# EAGLE board keycopy (EAGLE 6.3)
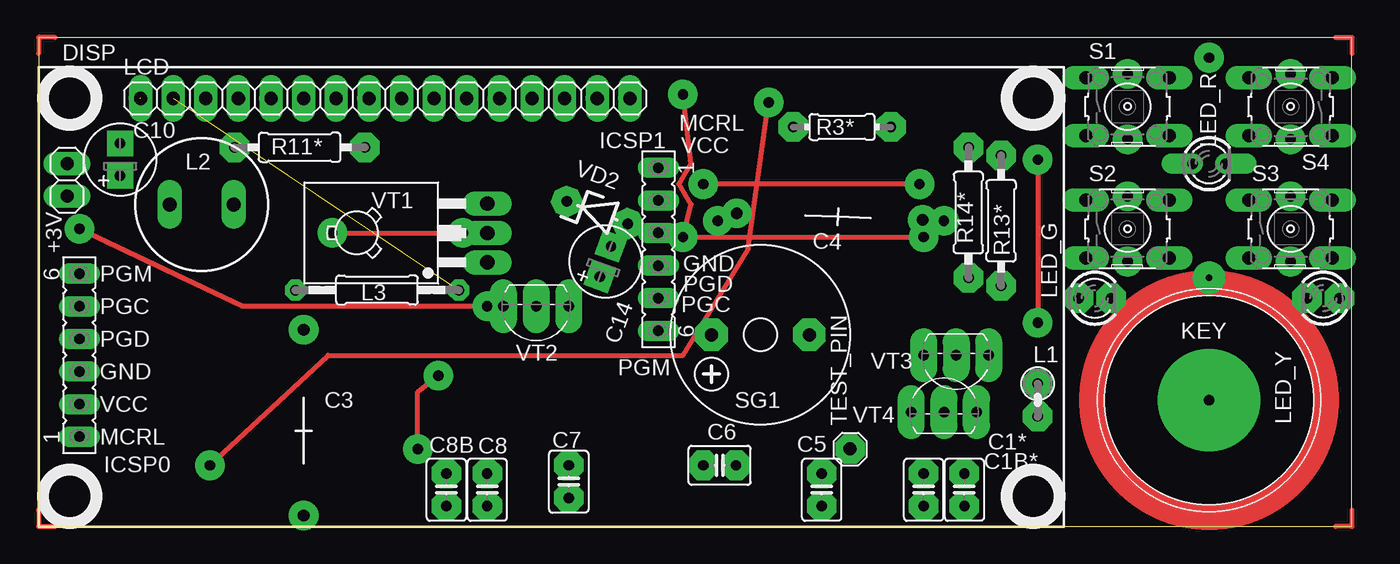
[diagram p0: board, top side]
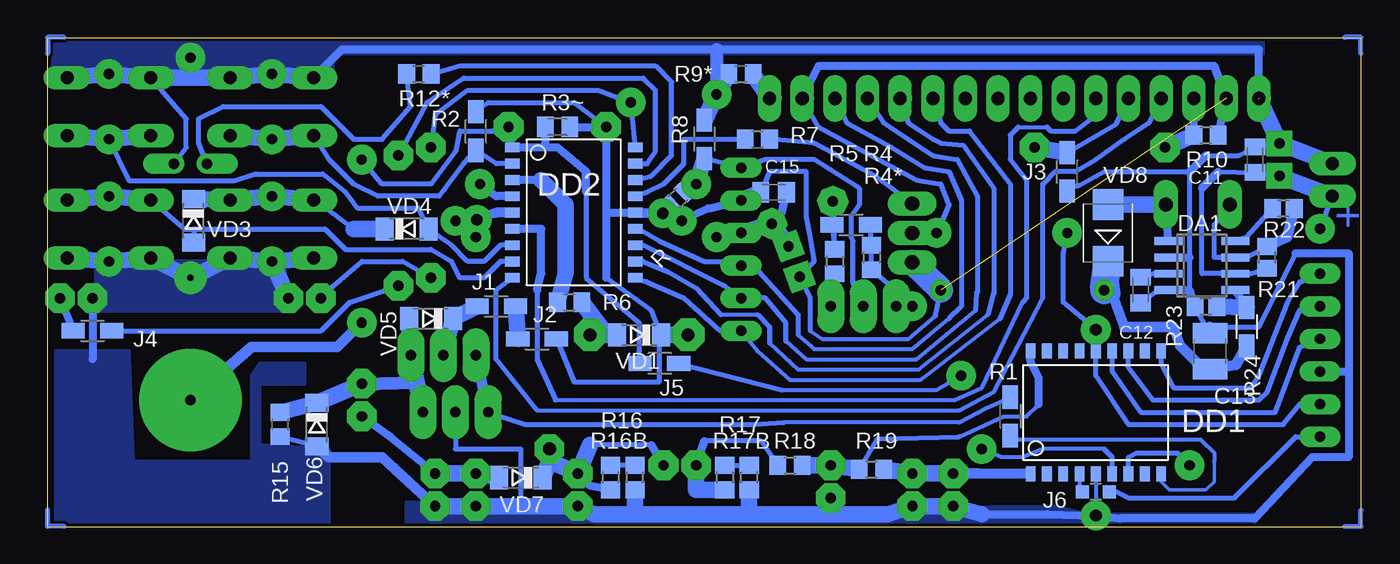
[diagram p1: board, bottom side, seen from below]

Size 102.21 x 38.1 mm. Coordinates in mm from the lower left corner, seen from the top.
Outline: 102.21,0 102.21,38.1 0,38.1 0,0 102.21,0
Copper layers (1*16): Top 0.035mm / dielectric 1.5mm / Bottom 0.035mm
Design rules "DesignRules": minimum track width 8mil, minimum drill 24mil, track to track 0.2mm, track to pad 0.2mm, pad to pad 8mil, via to via 8mil, smd to smd 8mil, copper to edge 10mil, drill to drill 8mil, minimum pad ring 0.4mm, minimum via ring 8mil, stop-mask expansion 4mil, vias tented up to drill 0mil, thermal gap 10mil

## Footprints (pad centres in the part's own frame; a part is rotated, then mirrored left to right if it is on the bottom)
1X02 = drill 1.016 long: 1 -1.27,0; 2 1.27,0
C025-030X050 = drill 0.8 pad 2.3 octagon: 1 -1.27,0; 2 1.27,0
CAP-PTH-LARGE = drill 0.9 pad 2.3: 1 -7.866,0; 2 6.612,0
E2,5-6 = drill 0.813 pad 2 square: + -1.27,0; - 1.27,0
C0805K = smd 1.3 x 1.6: 1 -1,0; 2 1,0
C1210 = smd 1.6 x 2.7: 1 -1.4,0; 2 1.4,0
SOIC8 = smd 0.6 x 2.2: 1 -1.905,-2.6; 2 -0.635,-2.6; 3 0.635,-2.6; 4 1.905,-2.6; 5 1.905,2.6; 6 0.635,2.6; 7 -0.635,2.6; 8 -1.905,2.6
SO-18W = smd 0.762 x 1.143: 1 -5.08,-4.788; 2 -3.81,-4.788; 3 -2.54,-4.788; 4 -1.27,-4.788; 5 0,-4.788; 6 1.27,-4.788; 7 2.54,-4.788; 8 3.81,-4.788; 9 5.08,-4.788; 10 5.08,4.788; 11 3.81,4.788; 12 2.54,4.788; 13 1.27,4.788; 14 0,4.788; 15 -1.27,4.788; 16 -2.54,4.788; 17 -3.81,4.788; 18 -5.08,4.788
TUXGR_16X2_1 = drill 1 pad 1.676: 1 -32,15.5; 2 -29.46,15.5; 3 -26.92,15.5; 4 -24.38,15.5; 5 -21.84,15.5; 6 -19.3,15.5; 7 -16.76,15.5; 8 -14.22,15.5; 9 -11.68,15.5; 10 -9.14,15.5; 11 -6.6,15.5; 12 -4.06,15.5; 13 -1.52,15.5; 14 1.02,15.5; 15 3.56,15.5; 16 6.1,15.5
FE06 = drill 0.813 long: 1 -6.35,0; 2 -3.81,0; 3 -1.27,0; 4 1.27,0; 5 3.81,0; 6 6.35,0
R1206W = smd 1.8 x 1.2: 1 -1.499,0; 2 1.499,0
R0805W = smd 1 x 1: 1 -1.052,0; 2 1.052,0
DS1990 = drill 0.8 pad 8: P$1 0,0 | drill 0.5 pad 2.54: P$2 0,9.525
0207/2V = drill 0.813 pad 2.3 octagon: 1 -1.27,0; 2 1.27,0
SD12K100 = drill 1.1 long: 1 -2.5,0; 2 2.5,0
0207/12 = drill 0.813 octagon: 1 -6.35,0; 2 6.35,0
1X16 = drill 1.016 long: 1 -19.05,0; 2 -16.51,0; 3 -13.97,0; 4 -11.43,0; 5 -8.89,0; 6 -6.35,0; 7 -3.81,0; 8 -1.27,0; 9 1.27,0; 10 3.81,0; 11 6.35,0; 12 8.89,0; 13 11.43,0; 14 13.97,0; 15 16.51,0; 16 19.05,0
LED3MM = drill 0.813 pad 2.3 octagon: A -1.27,0; K 1.27,0
LED3MM' = drill 0.813 offset: A -1.27,0; K 1.27,0
R0805 = smd 1.3 x 1.5: 1 -0.95,0; 2 0.95,0
0204/7 = drill 0.813 pad 2.3 octagon: 1 -3.81,0; 2 3.81,0
M0805 = smd 1.3 x 1.6: 1 -0.95,0; 2 0.95,0
0207/10 = drill 0.813 pad 2.3 octagon: 1 -5.08,0; 2 5.08,0
R0805' = smd 1.3 x 1.5: 1 -0.85,0; 2 0.85,0
B3F-10XX = drill 1.016 long: 1 -3.251,2.261; 2 3.251,2.261; 3 -3.251,-2.261; 4 3.251,-2.261
F/CM12P = drill 1.016 pad 2.54 octagon: + 3.81,0; - -3.81,0
1X01 = drill 1.016 pad 2.3 octagon: 1 0,0
PROGRAMMER_KEY = drill 0.8 pad 2.3: P$1 -2.54,0.635; P$2 2.54,0.635
SOD80C = smd 1.4 x 1.8: A 1.7,0; C -1.7,0
ZDIO-5 = drill 0.813 pad 2.3 octagon: A 2.54,0; C -2.54,0
SMB = smd 2.4 x 2.4: A 2.2,0; C -2.2,0
TO126 = drill 1.118 long: 1 -2.286,-5.08; 2 0,-5.08; 3 2.286,-5.08
TO92-BCE = drill 0.813 pad 2.1 long: B -2.54,0; C 0,0; E 2.54,0
TO92-ECB = drill 0.813 pad 2.1 long: B 2.54,0; C 0,0; E -2.54,0

## Placement (x,y rotation side)
+3V  [1X02]  2.22,27 90 top
C1*  2n2  [C025-030X050]  72.07,2.87 270 top
C1B*  [C025-030X050]  68.9,2.87 270 top
C3  3n3  [CAP-PTH-LARGE]  20.64,7.47 270 top
C4  3n3  [CAP-PTH-LARGE]  62.23,24.14 358 top
C5  1n  [C025-030X050]  60.96,2.87 270 top
C6  1n  [C025-030X050]  53.02,4.78 180 top
C7  3n3  [C025-030X050]  41.27,3.51 270 top
C8  100n  [C025-030X050]  34.93,2.87 270 top
C8B  47n  [C025-030X050]  31.75,2.87 270 top
C10  47n  [E2,5-6]  6.35,28.59 90 top
C11  100n  [C0805K]  8.26,28.59 90 bottom
C12  1n  [C0805K]  17.14,18.43 270 bottom
C13  22m  [C1210]  11.75,13.66 90 bottom
C14  47m  [E2,5-6]  44.13,20.65 70 top
C15  100n  [C0805K]  45.72,26.05 0 bottom
DA1  MC34063AD  [SOIC8]  12.38,20.33 270 bottom
DD1  PIC16F648A  [SO-18W]  20.64,8.9 0 bottom
DD2  PIC16F648A  [SO-18W]  61.28,24.46 270 bottom
DISP  QC1602A V2.0  [TUXGR_16X2_1]  39.93,17.87 0 top
ICSP0  [FE06]  3.17,13.35 90 top
ICSP1  [FE06]  48.26,21.6 270 top
J1  [R1206W]  67.31,17.16 0 bottom
J2  [R1206W]  64.13,14.62 0 bottom
J3  [R1206W]  22.86,27.64 90 bottom
J4  [R1206W]  98.74,15.25 0 bottom
J5  [R1206W]  54.61,12.71 180 bottom
J6  [R0805W]  20.64,2.71 180 bottom
KEY  DS1990  [DS1990]  91.12,9.85 0 top
L1  777uH  [0207/2V]  77.79,9.85 270 top
L2  100uH  [SD12K100]  12.7,25.1 0 top
L3  100uH  [0207/12]  26.35,18.43 0 top
LCD  [1X16]  26.99,33.35 0 top
LED_G  WR  [LED3MM]  82.23,17.79 0 top
LED_R  ON  [LED3MM']  91.12,28.27 0 top
LED_Y  RD  [LED3MM]  100.01,17.79 180 top
R  10k  [R0805]  53.18,25.57 225 bottom
R1  1k  [R1206W]  27.3,8.58 270 bottom
R2  10k  [R1206W]  68.9,30.81 90 bottom
R3*  1k2  [0204/7]  62.55,31.13 180 top
R3~  SMD  [M0805]  62.55,31.13 0 bottom
R4  1k  [R1206W]  39.69,23.51 0 bottom
R4*  20  [R0805]  38.1,20.97 270 bottom
R5  10k  [R0805]  40.96,20.65 270 bottom
R6  150  [R0805]  61.59,17.48 0 bottom
R7  1k  [R0805]  46.99,30.18 0 bottom
R8  10k  [R1206W]  51.12,30.18 270 bottom
R9*  510  [R0805]  48.26,35.25 0 bottom
R10  1k  [R0805]  12.06,30.49 0 bottom
R11*  270  [0207/10]  20.32,29.54 180 top
R12*  1k  [R0805]  73.34,35.25 0 bottom
R13*  1k1  [0207/10]  74.93,23.83 90 top
R14*  750  [0207/10]  72.39,24.46 90 top
R15  1k  [R0805]  84.14,7.95 90 bottom
R16  910k  [R0805]  58.42,3.82 270 bottom
R16B  91k  [R0805]  56.52,3.82 90 bottom
R17  910k  [R0805]  49.53,3.82 270 bottom
R17B  91k  [R0805]  47.62,3.82 90 bottom
R18  22k  [R0805]  44.45,4.78 0 bottom
R19  47k  [R0805]  38.1,4.46 0 bottom
R21  0.5R  [R0805']  7.3,20.97 90 bottom
R22  150  [R0805']  6.03,24.78 180 bottom
R23  1k  [R0805']  12.06,17.16 0 bottom
R24  3k  [R1206W]  8.89,15.57 270 bottom
S1  Enter  [B3F-10XX]  84.77,32.71 0 top
S2  Menu  [B3F-10XX]  84.77,23.19 0 top
S3  Dn  [B3F-10XX]  97.47,23.19 0 top
S4  Up  [B3F-10XX]  97.47,32.71 180 top
SG1  F/CM12P  [F/CM12P]  56.2,14.93 180 top
TEST_PIN  +30V  [1X01]  63.18,6.04 90 top
U$1  PROGRAMMER_5.08  [PROGRAMMER_KEY]  85.41,32.71 90 top
U$6  PROGRAMMER_5.08  [PROGRAMMER_KEY]  96.84,32.71 270 top
U$7  PROGRAMMER_5.08  [PROGRAMMER_KEY]  98.11,23.19 90 top
U$8  PROGRAMMER_5.08  [PROGRAMMER_KEY]  85.41,23.19 90 top
VD1  5v6  [SOD80C]  56.2,14.93 180 bottom
VD2  1v5*  [ZDIO-5]  43.5,24.46 340 top
VD3  LL4148  [SOD80C]  90.88,23.83 270 bottom
VD4  LL4148  [SOD80C]  74.3,23.19 0 bottom
VD5  LL4148  [SOD80C]  72.39,16.21 180 bottom
VD6  LL4148  [SOD80C]  81.28,7.95 270 bottom
VD7  LL4848  [SOD80C]  65.41,3.82 180 bottom
VD8  SS14  [SMB]  19.68,22.87 90 bottom
VT1  КТ816  [TO126]  29.84,22.87 90 top
VT2  КТ361Б  [TO92-BCE]  38.73,17.16 180 top
VT3  КТ315  [TO92-ECB]  71.44,13.35 180 top
VT4  КТ361  [TO92-BCE]  70.48,8.9 0 top

## Library data of the parts
+3V C1* C1B* C3-C8 C8B C10 C14 DISP J1-J6 L1 R1 R3* R3~ R7 R9* R11* R13* R14* TEST_PIN VD2 VT1-VT4 = keycopy
C11 C12 C15 R21-R24 = resistor
C13 L3 R R2 R4 R4* R5 R6 R8 R10 R12* R15 R16 R16B R17 R17B R18 R19 = rcl
DA1 = mc34063
DD1 DD2 = microchip; MF: MICROCHIP; MPN: PIC16F628-20I/SO; OC_FARNELL: 9760415; OC_NEWARK: 23C4986
ICSP0 ICSP1 = con-lsta; OC_FARNELL: unknown; OC_NEWARK: unknown
KEY = keysens
L2 = inductor-neosid; OC_FARNELL: unknown; OC_NEWARK: unknown
LCD = pinhead
LED_G LED_Y = keycopy2
LED_R = keycopy3
S1-S4 = switch-omron; MPN: B3F-1000; OC_FARNELL: 176432; OC_NEWARK: 36M3542
SG1 = buzzer; OC_FARNELL: unknown; OC_NEWARK: unknown
U$1 U$6-U$8 = HWProgUSB
VD1 VD3-VD8 = diode

## Nets
1W: DD2.1 J5.2 KEY.P$1 R3*.1 R3~.1
A0: DD2.17 R13*.2
A1: DD1.7 DD2.18 R14*.2
A4: DD2.3 R6.1
A5: DD2.4 ICSP1.1 R8.2 R.1 VT2.C
A6: DD2.15 R7.1
A7: DD2.16 R12*.2
B0: DD2.6 LCD.6
B3: DD2.9 LCD.4
B4: DD2.10 ICSP1.6 LCD.11
B5: DD2.11 LCD.12
B6: DD2.12 ICSP1.5 LCD.13
B7: DD2.13 ICSP1.4 LCD.14
GND: +3V.2 C1*.2 C1B*.2 C3.2 C4.2 C5.2 C7.2 C8.2 C8B.2 C10.- C11.2 C12.2 C13.2 C14.- C15.2 DA1.2 DA1.4 DD1.5 DD2.5 DISP.1 ICSP0.3 ICSP1.3 J3.1 KEY.P$2 LCD.1 LED_G.K LED_R.K LED_Y.K R8.1 R9*.1 R15.1 R16B.1 R17B.1 R23.1 S1.1 S1.2 S2.3 S2.4 S3.3 S3.4 S4.3 S4.4 U$1.P$2 U$6.P$1 U$7.P$1 U$8.P$1 VD2.A VD6.A VT4.C
LG: LED_G.A R14*.1
LR: LED_R.A R12*.1
LY: J4.1 LED_Y.A
MCRL: DD1.4 J6.2
N$1: R1.1 VT3.B VT4.B
N$2: C1*.1 C1B*.1 L1.2 VD7.A
N$3: C13.1 L3.1 R24.2 VD8.C
N$4: DD1.9 R1.2
N$5: DD1.6 J5.1
N$6: C5.1 C6.1 R16.2 TEST_PIN.1 VD7.C
N$7: R7.2 VT1.3
N$8: R6.2 SG1.- VD1.A
N$9: LCD.16 R9*.2
N$10: J1.1 VD5.C VT3.C
N$11: R16.1 R16B.2
N$12: LCD.3 R10.1 R11*.2
N$13: DD2.7 S4.1 S4.2 U$6.P$2 VD4.A
N$14: S2.1 S2.2 U$8.P$2 VD3.C VD4.C
N$15: DD2.8 S3.1 S3.2 U$7.P$2 VD3.A
N$16: C6.2 R17.2 R18.1
N$17: R4.1 R5.1 VD2.C
N$18: R5.2 VT2.B
N$19: ICSP0.1 J6.1
N$20: J4.2 R13*.1
N$21: L1.1 R15.2 VD5.A VD6.C VT3.E VT4.E
N$22: J1.2 J2.1
N$23: R17.1 R17B.2
N$24: J3.2 LCD.5 R11*.1
N$26: C12.1 DA1.3
N$28: DA1.1 L2.2 VD8.A
N$29: DA1.7 L2.1 R21.2 R22.1
N$30: DA1.8 R22.2
N$31: DA1.5 R23.2 R24.1
N$38: R4*.1 R4.2
PGC: DD1.12 ICSP0.5
PGD: DD1.13 ICSP0.4
PGM: DD1.10 ICSP0.6
RA1: C7.1 DD1.18 R18.2 R19.1
RA2: C8.1 C8B.1 DD1.1 R19.2
S1: DD2.2 R2.1 S1.3 S1.4 U$1.P$1
V+: +3V.1 C10.+ C11.1 DA1.6 R4*.2 R21.1 VT2.E
VCC: C4.1 C14.+ C15.1 DD2.14 DISP.2 ICSP1.2 J2.2 L3.2 R2.2 R3*.2 R3~.2 R.2 SG1.+ VD1.C VT1.1
VCC/2: C3.1 DD1.14 ICSP0.2 LCD.2 LCD.15 R10.2 VT1.2

## Tracks (layer width: path | path; a pad name or v marks a point on that pad's centre or on a via)
1W  (via drill 0.8 pad 2.3)
  Top 0.406: v77.79,28.59 v77.79,15.89
  Bottom 0.406: v77.79,28.59 76.2,26.68 72.39,26.68 70.48,29.22 70.17,30.81 67.63,30.81 R3*.1 | 60.33,26.05 60.33,19.38 56.2,15.89 56.2,13.66 J5.2
  Bottom 0.61: R3*.1 DD2.1 63.5,29.54 | 60.33,26.05 60.33,27.64 62.55,29.54 63.5,29.54 | R3~.1 63.5,29.54
  Bottom 0.813: KEY.P$1 86.36,13.98 79.69,13.98 v77.79,15.89
A0
  Bottom 0.406: R13*.2 72.71,33.03 69.85,34.94 55.88,34.94 54.93,33.99 54.93,29.22 55.56,28.27 DD2.17
A1  (via drill 0.8 pad 2.3)
  Top 0.406: v13.34,4.77 22.54,13.35 50.16,13.35 55.25,21.6 v56.83,33.03
  Bottom 0.406: R14*.2 72.07,32.08 69.53,33.99 59.37,33.99 v56.83,33.03 DD2.18 | DD1.7 18.1,4.14 | 18.1,4.14 18.2,3.76 | 18.1,4.14 18.1,5.41 17.46,5.73 14.29,5.73 v13.34,4.77
A4
  Bottom 0.61: 63.82,27 DD2.3
  Bottom 1.27: R6.1 61.91,19.7 61.91,25.1 63.82,27
A5  (via drill 0.8 pad 2.3)
  Top 0.406: v68.58,26.68 v51.75,26.68
  Bottom 0.305: R.1 52.35,26.08 v51.75,26.68
  Bottom 0.406: R8.2 ICSP1.1 46.36,28.59 42.55,28.59 39.05,26.37 39.05,25.1 39.69,24.14 39.69,22.55 39.53,22.24 39.53,19.06 VT2.C
  Bottom 0.61: DD2.4 67.31,25.73 v68.58,26.68
  Bottom 1.27: R8.2 v51.75,26.68
A6
  Bottom 0.406: DD2.15 55.56,26.05 54.29,26.68 52.71,28.27 52.71,30.17 R7.1
A7
  Bottom 0.406: R12*.2 70.17,35.89 54.93,35.89 53.66,34.62 53.66,28.9 55.25,27.32 DD2.16
B0
  Bottom 0.305: 62.71,9.85 31.59,9.85 29.53,10.81 26.35,17.48 | 26.67,31.13 24.45,31.13
  Bottom 0.406: LCD.6 20.95,31.76 22.22,30.81 24.13,30.81 24.45,31.13 | 64.13,18.43 64.13,13.03 62.71,9.85 | 26.67,31.13 27.3,30.49 27.3,28.59 26.04,27 26.04,17.79 26.35,17.48
  Bottom 0.61: 64.13,18.43 63.82,19.7 63.82,23.19 DD2.6
B3
  Bottom 0.305: 64.13,9.06 31.27,9.06 28.57,10.49 24.76,17.79
  Bottom 0.406: LCD.4 16.51,31.45 18.41,30.17 20.64,28.59 22.22,27.64 23.81,27.64 24.76,26.68 24.76,17.79 | 64.13,9.06 67.33,13.06 67.31,18.43 DD2.9
B4
  Bottom 0.305: ICSP1.6 46.99,13.66 44.45,11.44 34.29,11.44 28.1,16.21
  Bottom 0.406: LCD.11 32.7,31.45 32.07,30.81 30.48,30.81 27.3,26.68 27.3,18.11 28.1,16.21 | DD2.10 55.56,19.06 52.71,17.79 49.85,15.25 ICSP1.6
B5
  Bottom 0.305: 49.85,16.52 46.99,16.52 | 46.04,14.3 43.82,12.24 34.45,12.24 29.05,16.52
  Bottom 0.406: DD2.11 55.88,20.65 53.98,19.86 51.75,18.59 49.85,16.52 | LCD.12 35.24,31.45 33.34,30.17 32.7,29.86 30.96,29.7 28.57,26.37 28.57,18.22 arc45 28.65,18.04 29.05,16.52 | 46.99,16.52 46.04,15.57 46.04,14.3
B6
  Bottom 0.305: 44.77,14.46 43.18,13.03 34.61,13.03 30,16.84
  Bottom 0.406: DD2.12 55.88,21.92 49.53,18.74 ICSP1.5 46.36,17.79 44.77,15.89 44.77,14.46 | LCD.13 37.15,31.45 33.34,28.9 31.43,28.59 29.84,25.73 29.84,18.37 arc45 29.92,18.19 30,16.84
B7
  Bottom 0.305: 43.82,14.93 42.55,13.82 34.93,13.82 32.07,16.21
  Bottom 0.406: DD2.13 56.2,23.19 54.61,22.24 51.12,20.65 49.21,20.65 ICSP1.4 47.31,20.33 43.82,16.52 43.82,14.93 | LCD.14 40.01,31.45 36.51,29.54 33.97,27.95 32.07,27.64 31.11,25.41 31.11,17.16 32.07,16.21
GND  (via drill 0.8 pad 2.3)  (1 unrouted)
  Top 0.406: v68.9,22.55 v50.16,22.55 50.8,25.1 49.85,26.68 50.8,28.27 v50.16,33.67
  Bottom 0.305: DD1.5 C3.2
  Bottom 0.406: VD6.A R15.1 | VT4.C 70.48,6.05 65.41,6.05 65.41,1.6 | LED_R.K 91.44,29.54 91.44,31.76 S4.4 | 13.34,18.43 13.34,20.97 13.34,27.64 20,27.64 22.05,26.54 22.14,26.54 J3.1 | 12.06,28.9 9.53,28.9 C11.2 C10.- | DA1.4 15.95,18.26 C12.2 | 5.08,21.28 7.94,15.57 11.75,15.57 12.06,15.57 R23.1
  Bottom 0.61: S1.1 79.34,37.16 50.16,37.16 7.94,37.16 LCD.1 | 0.95,12.08 0.95,21.28 5.08,21.28 | 0.95,12.08 0.95,5.41 3.81,5.41 8.26,0.65 18.73,0.65 C3.2 24.45,0.96 29.53,0.96 | ICSP0.3 0.95,12.08 | 12.06,28.9 13.34,27.64 | VD2.A 45.09,24.46 C15.2 | v68.9,22.55 C4.2 v70.48,23.83 | DA1.4 13.34,18.43 R23.1 | DA1.2 13.34,20.97 | LED_Y.K 98.74,13.03
  Bottom 0.762: DD2.5 67.31,24.46 C4.2
  Bottom 0.813: C1*.2 76.2,5.41 80.33,5.41 VD6.A | C13.2 11.75,15.57
  Bottom 1.016: 50.16,37.16 v50.16,33.67
  Bottom 1.27: S1.1 U$1.P$2 S1.2 S4.4 U$6.P$1 S4.3 | S3.4 U$7.P$1 S3.3 KEY.P$2 S2.4 U$8.P$1 | S2.3 U$8.P$1 | U$8.P$1 LED_G.K | C1*.2 C1B*.2 65.41,1.6 C5.2 59.69,0.96 56.52,0.96 | 56.52,0.96 47.62,0.96 | 47.62,0.96 41.27,0.96 | 41.27,0.96 36.83,0.96 C8.2 C8B.2 29.53,0.96 | R16B.1 56.52,0.96 | R17B.1 47.62,0.96 | LCD.1 C10.- +3V.2 | R8.1 v50.16,33.67 R9*.1 | v50.16,22.55 ICSP1.3 VD2.A C14.- | C7.2 41.27,0.96
  other vias: 91.12,36.52
  pour Bottom (no thermals): 83.82,16.84 98.42,16.84 98.42,20.65 83.82,20.65
  pour Bottom (no thermals): 95.88,13.66 101.6,13.66 101.6,0.01 80.33,0.01 80.33,6.04 85.72,6.36 85.72,11.12 82.23,11.12 82.23,12.71 85.72,12.71 86.36,11.76 86.36,5.09 95.57,5.09 95.88,13.35
  pour Bottom (no thermals): 80.01,37.95 80.01,34.94 102.08,34.94 102.08,37.95
  pour Bottom (no thermals): 80.01,37.79 7.62,37.79 7.62,36.84 80.01,36.84
  pour Bottom (no thermals): 74.3,1.92 74.3,0.33 8.26,0.33 8.26,0.96 21.27,0.96 23.81,1.6 64.13,1.28
LG
  Bottom 0.406: R14*.1 74.61,20.65 77.79,20.65 80.01,18.74 LED_G.A
LR
  Bottom 0.406: R12*.1 73.98,32.71 76.2,30.17 78.42,30.17 80.96,32.71 88.58,32.71 90.49,31.76 90.49,29.86 LED_R.A
LY
  Bottom 0.61: LED_Y.A J4.1
MCRL
  Bottom 0.305: DD1.4 21.91,3.19
  Bottom 0.406: J6.2 21.69,2.97 21.91,3.19
N$1
  Bottom 0.305: 44.93,8.11 31.27,8.11 29.21,9.22 R1.1
  Bottom 0.406: VT4.B 65.09,7.95 47.31,7.95 44.93,8.11
  Bottom 0.813: VT3.B VT4.B
N$2
  Bottom 0.61: L1.2 75.56,7 C1*.1
  Bottom 1.27: C1*.1 C1B*.1 VD7.A
N$3
  Bottom 0.813: 19.37,18.11 18.41,15.57 14.61,15.57 14.06,14.07 12.57,12.58 C13.1 9.74,12.58 R24.2
  Bottom 1.27: VD8.C 19.37,18.11
  Bottom 2.184: L3.1 VD8.C
N$4
  Bottom 0.254: 15.53,4.14 15.53,3.48 14.92,2.87 12.06,2.87 11.43,3.51 11.43,5.09
  Bottom 0.305: 11.43,5.09 11.43,5.73 12.47,6.77 26.99,6.77 R1.2 | 15.53,4.14 DD1.9
N$5  (via drill 0.8 pad 2.3)
  Top 0.406: v29.53,6.05 29.53,10.49 v31.11,11.76
  Bottom 0.305: 45.09,10.65 33.02,10.65 v31.11,11.76 | 20,6.05 24.76,6.05 26.35,5.41 27.94,5.41 v29.53,6.05
  Bottom 0.406: DD1.6 19.37,5.41 20,6.05 | J5.1 45.09,10.65
N$6
  Bottom 0.406: 55.25,6.36 60.01,6.36
  Bottom 0.61: C6.1 55.25,6.36 | R16.2 60.01,3.19 C5.1
  Bottom 1.27: TEST_PIN.1 63.26,5.12 | 63.26,5.12 63.28,4.78 VD7.C | 63.26,5.12 C5.1 60.01,6.36
N$7
  Bottom 0.406: VT1.3 37.78,27.32 42.55,29.86 R7.2
N$8
  Bottom 1.27: VD1.A 58.74,14.93 | 58.74,14.93 SG1.- | R6.2 58.74,14.93
N$9
  Bottom 1.27: R9*.2 LCD.16
N$10
  Bottom 1.27: VT3.C VD5.C J1.1
N$11
  Bottom 0.406: R16B.2 R16.1
N$12
  Bottom 0.61: R10.1 LCD.3
  Bottom 1.27: R11*.2 R10.1
N$13
  Bottom 0.406: DD2.7 66.99,21.92 68.26,20.65 69.53,20.65 70.8,21.92 72.39,23.03 VD4.A 73.34,24.78 78.1,24.78 79.06,26.05 80.8,27.48 86.04,27.48 87.71,26.92 95.88,26.92 U$6.P$2
  Bottom 1.27: S4.2 U$6.P$2 S4.1
N$14
  Bottom 0.406: 78.42,23.19 80.96,25.1 S2.1
  Bottom 1.27: S2.1 U$8.P$2 S2.2 VD3.C | VD4.C 78.42,23.19
N$15
  Bottom 0.406: 90.8,23.19 91.6,23.19 93.86,25.13 S3.1 | 90.8,23.19 80.64,23.19 79.06,21.6 72.39,21.6 70.8,20.65 70.17,19.38 68.26,19.38 66.99,20.65 DD2.8 | VD3.A 90.8,23.19
  Bottom 1.27: S3.1 U$7.P$2 S3.2
N$16
  Bottom 0.406: R18.1 46.67,6.68 51.12,6.68
  Bottom 0.61: C6.2 51.12,6.68
  Bottom 1.27: R17.2 51.75,2.87 C6.2
N$17
  Bottom 0.406: VD2.C R5.1 R4.1
N$18
  Bottom 0.406: R5.2 VT2.B
N$19
  Bottom 0.406: ICSP0.1 5.08,7 9.84,2.23 18.1,2.23 19.37,2.87 J6.1
N$20
  Bottom 0.406: J4.2 80.96,15.25 78.74,17.48 R13*.1
N$21
  Bottom 1.016: L1.1 73.52,11.22
  Bottom 1.27: VD5.A VT3.E 73.52,11.22 VT4.E | L1.1 VD6.C R15.2
N$22
  Bottom 1.27: J1.2 J2.1
N$23
  Bottom 0.406: R17.1 R17B.2
N$24
  Bottom 0.406: J3.2 19.05,31.36 LCD.5
  Bottom 1.27: J3.2 R11*.1
N$25
  Bottom 0.406: 0,36.84 0,38.11 1.27,38.11
N$26
  Bottom 0.406: C12.1 16.19,19.7 DA1.3
N$27
  Top 0.406: 1.27,38.11 0,38.11 0,36.84
N$28
  Bottom 0.61: DA1.1 L2.2
  Bottom 1.27: L2.2 VD8.A
N$29
  Bottom 0.406: L2.1 11.43,23.51 11.43,20.97 DA1.7 8.89,20.97 R21.2
  Bottom 0.813: R22.1 5.71,22.55 R21.2
N$30
  Bottom 0.406: DA1.8 8.89,22.55 R22.2
N$31
  Bottom 0.61: R24.1 DA1.5
  Bottom 1.27: R23.2 R24.1
N$32
  Top 0.406: 0,1.28 0,0.01 1.27,0.01
N$33
  Bottom 0.406: 1.27,0.01 0,0.01 0,1.28
N$34
  Bottom 0.406: 100.96,0.01 102.23,0.01 102.23,1.28
N$35
  Top 0.406: 102.23,1.28 102.23,0.01 100.96,0.01
N$36
  Bottom 0.406: 100.96,38.11 102.23,38.11 102.23,36.84
N$37
  Top 0.406: 100.96,38.11 102.23,38.11 102.23,36.84
N$38
  Bottom 0.406: R4*.1 R4.2
N$39
  Bottom 0.406: 38.1,20.01 38.1,21.76
PGC
  Bottom 0.406: ICSP0.5 4.76,16.84 5.71,14.62 7.3,10.49 7.94,9.85 16.19,9.85 18.1,12.4 DD1.12
PGD
  Bottom 0.406: ICSP0.4 4.76,13.98 6.67,8.9 17.14,8.9 19.37,12.08 DD1.13
PGM
  Bottom 0.406: ICSP0.6 4.76,19.06 5.71,17.48 7.94,11.76 8.57,10.81 14.61,10.81 15.56,12.71 DD1.10
RA1
  Bottom 0.305: 31.27,7 27.78,8.58 26.04,8.58 25.08,9.54
  Bottom 0.406: R19.1 37.62,6.84 31.27,7
  Bottom 0.61: DD1.18 25.72,12.87 25.08,11.6 25.08,9.54
  Bottom 1.27: R19.1 C7.1 R18.2
RA2
  Bottom 0.813: DD1.1 29.84,4.14 C8B.1
  Bottom 1.27: C8B.1 C8.1 R19.2
S1
  Bottom 0.406: S1.3 80.33,28.59 78.42,26.68 76.52,25.73 71.75,25.73 71.34,26.29 69.85,28.27 R2.1 67.31,28.27 DD2.2
  Bottom 1.27: S1.3 U$1.P$1 S1.4
V+  (via drill 0.8 pad 2.3)
  Top 0.406: v34.93,17.16 15.88,17.16 v3.17,23.19
  Bottom 0.406: C10.+ C11.1 11.11,27.64 | 12.38,26.37 12.38,19.7 DA1.6 8.57,19.7 R21.1 | v34.93,17.16 VT2.E 36.83,18.9 R4*.2 | v3.17,23.19 +3V.1
  Bottom 0.61: 12.38,26.37 11.11,27.64
  Bottom 1.27: +3V.1 C10.+
VCC  (via drill 0.8 pad 2.3)  (1 unrouted)
  Bottom 0.305: 42.86,15.25 41.91,14.62 35.24,14.62 33.12,16.43 | R.2 54.05,24.74 C4.1
  Bottom 0.406: R2.2 68.9,32.4 67.94,33.03 61.28,33.03 R3*.2 | 58.74,19.38 55.25,16.84 VD1.C 54.61,13.98 54.61,11.28 61.28,11.28 J2.2 | 42.86,15.25 42.86,17.79 C14.+ 42.55,20.65 42.86,22.55 43.18,24.14 43.18,27.64 46.04,27.64 C15.1 | 33.12,16.43 L3.2
  Bottom 0.61: 58.74,24.46 DD2.14 | 58.74,19.38 58.74,24.46 | 58.74,24.46 R3*.2 R3~.2 | C4.1 v52.86,23.83 50.8,24.78 ICSP1.2
  Bottom 0.762: DD2.14 C4.1
  Bottom 1.27: SG1.+ VD1.C | C15.1 ICSP1.2
  Bottom 1.93: L3.2 VT1.1
VCC/2  (via drill 0.8 pad 2.3)
  Top 0.406: v22.86,22.87 v33.02,22.87
  Bottom 0.406: LCD.15 42.23,31.13 34.61,27 32.7,26.68 32.07,25.1 v33.02,22.87 VT1.2 | ICSP0.2 4.76,9.54 6.03,7.95 18.1,7.95 20.64,11.76 DD1.14 C3.1 23.18,17.48 23.18,21.28 v22.86,22.87
  Bottom 0.61: R10.2 LCD.2 11.43,35.89 42.23,35.89 LCD.15

## Text on the board
Bottom: +
tPlace: MCRL | VCC | PGM | GND | PGD | PGC | PGC | PGD | GND | PGM | VCC | MCRL